# Altium PCB motorPCB.PcbDoc
Units mm, origin at the board's own origin, x right, y up, seen from the top; angles counter-clockwise.
Board outline 85 x 80 mm, 4 copper layers (Top Layer, POWER, GROUND, Bottom Layer), stack 4.342 mm thick; 134 components, 103 nets, 384 pads, 69 vias.
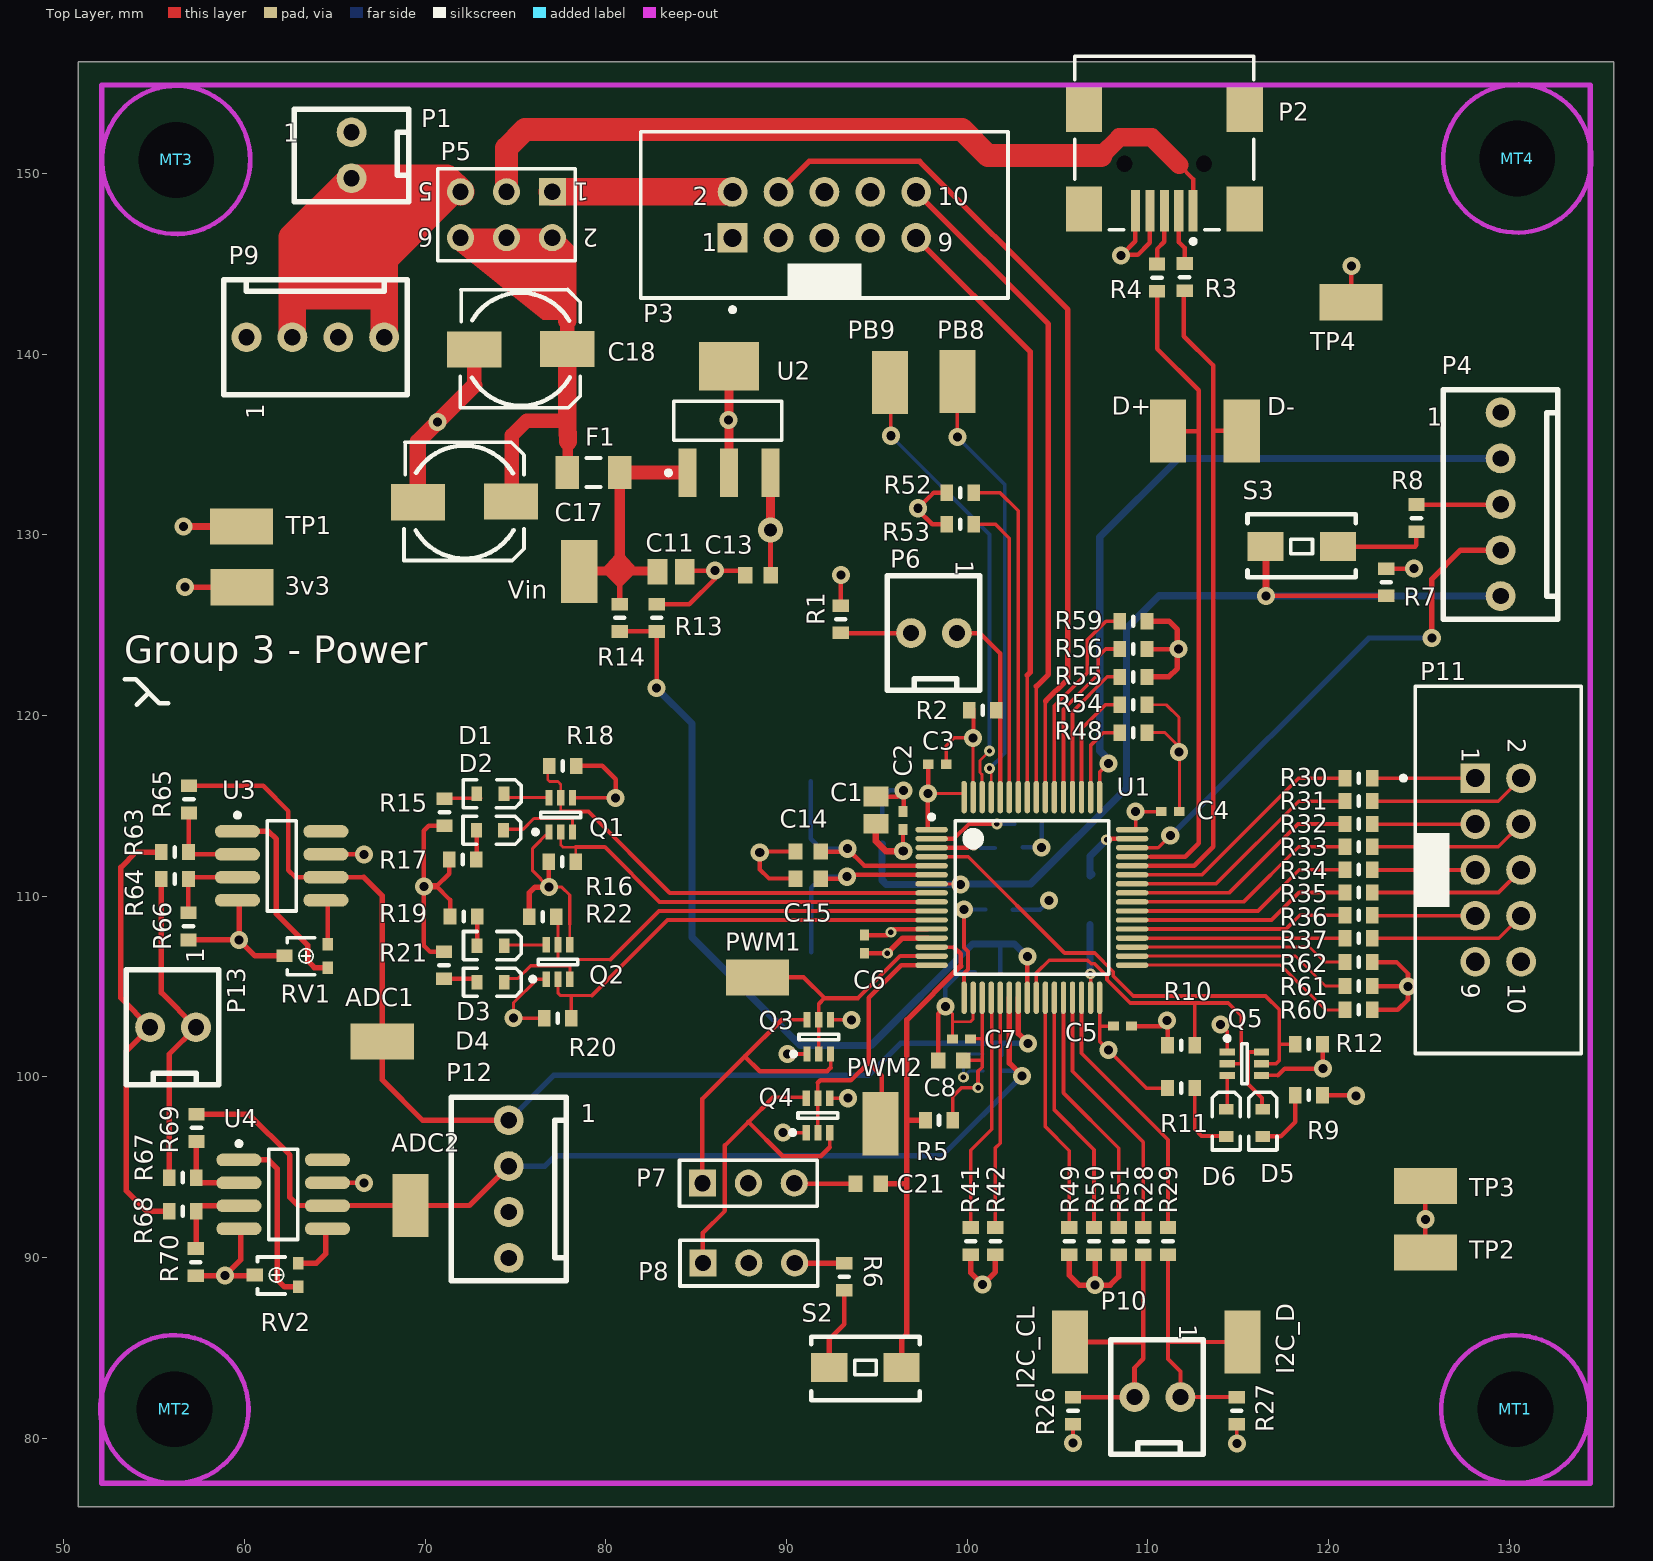
[diagram p0: Top Layer view]
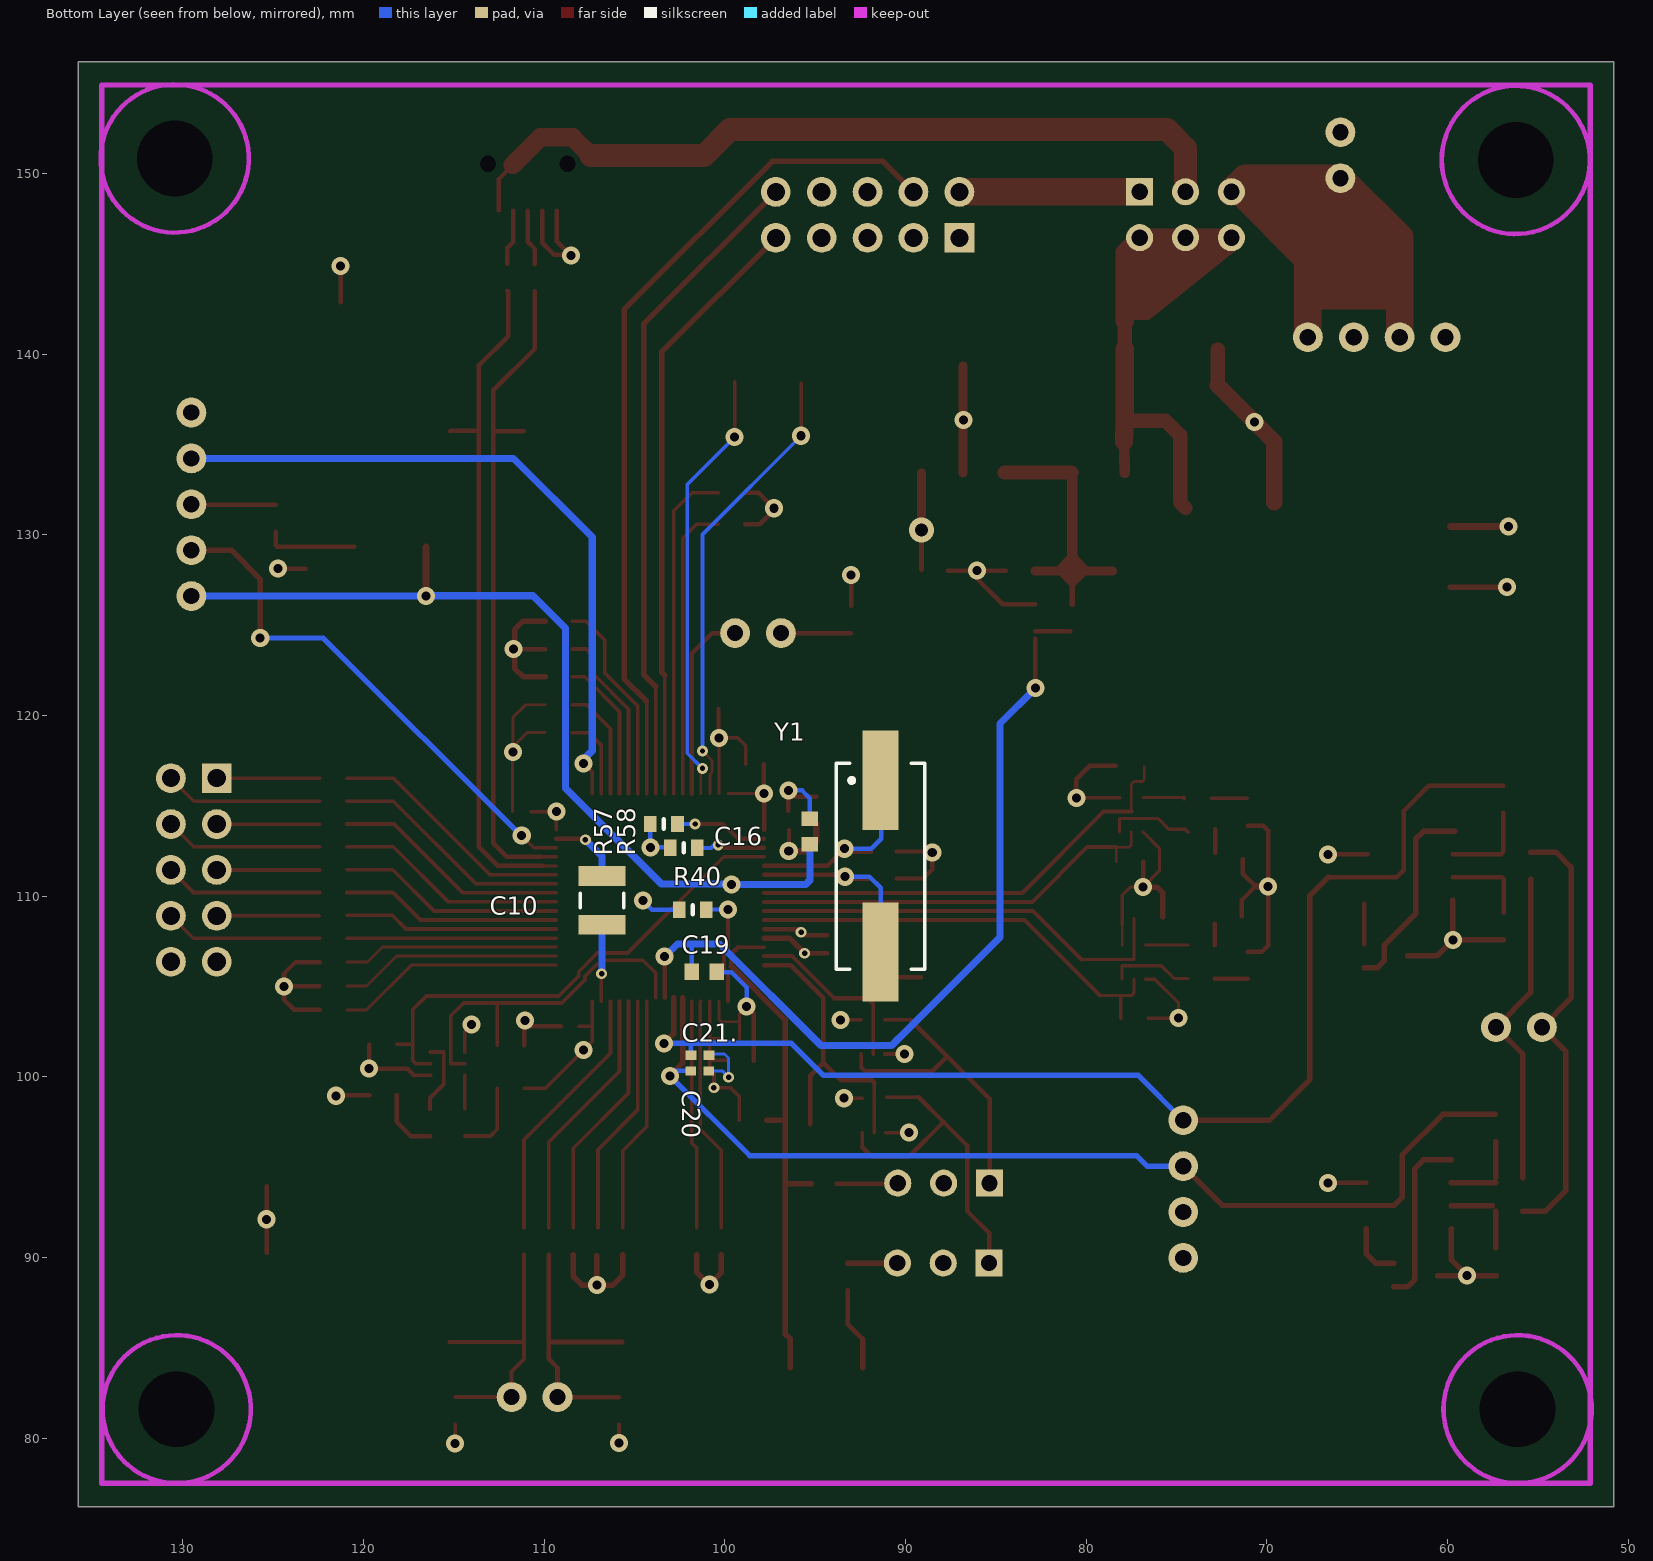
[diagram p1: Bottom Layer view, seen from below]
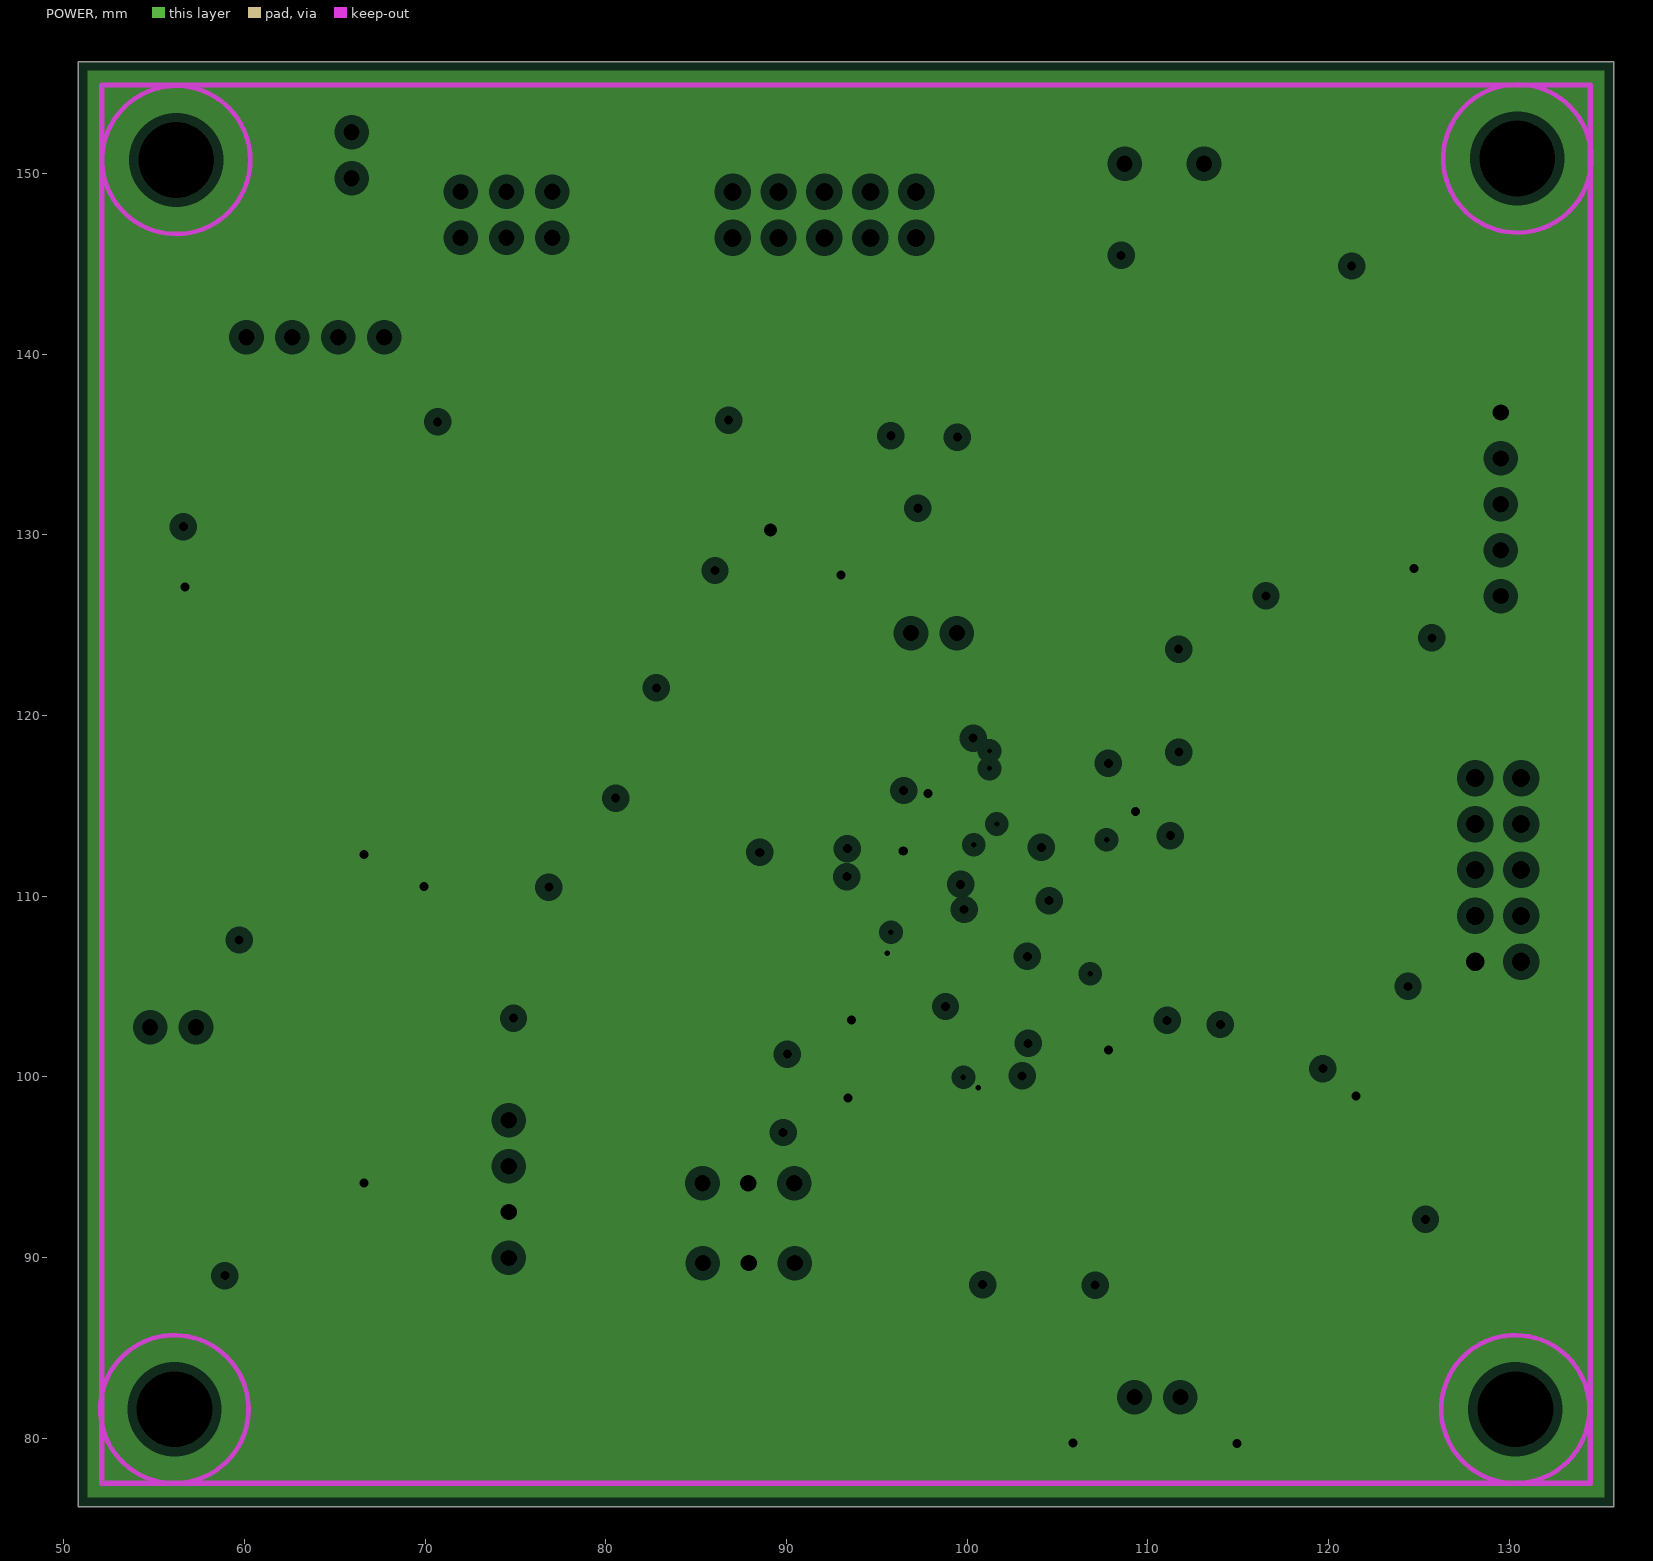
[diagram p2: POWER, clearances drawn from the general rule]
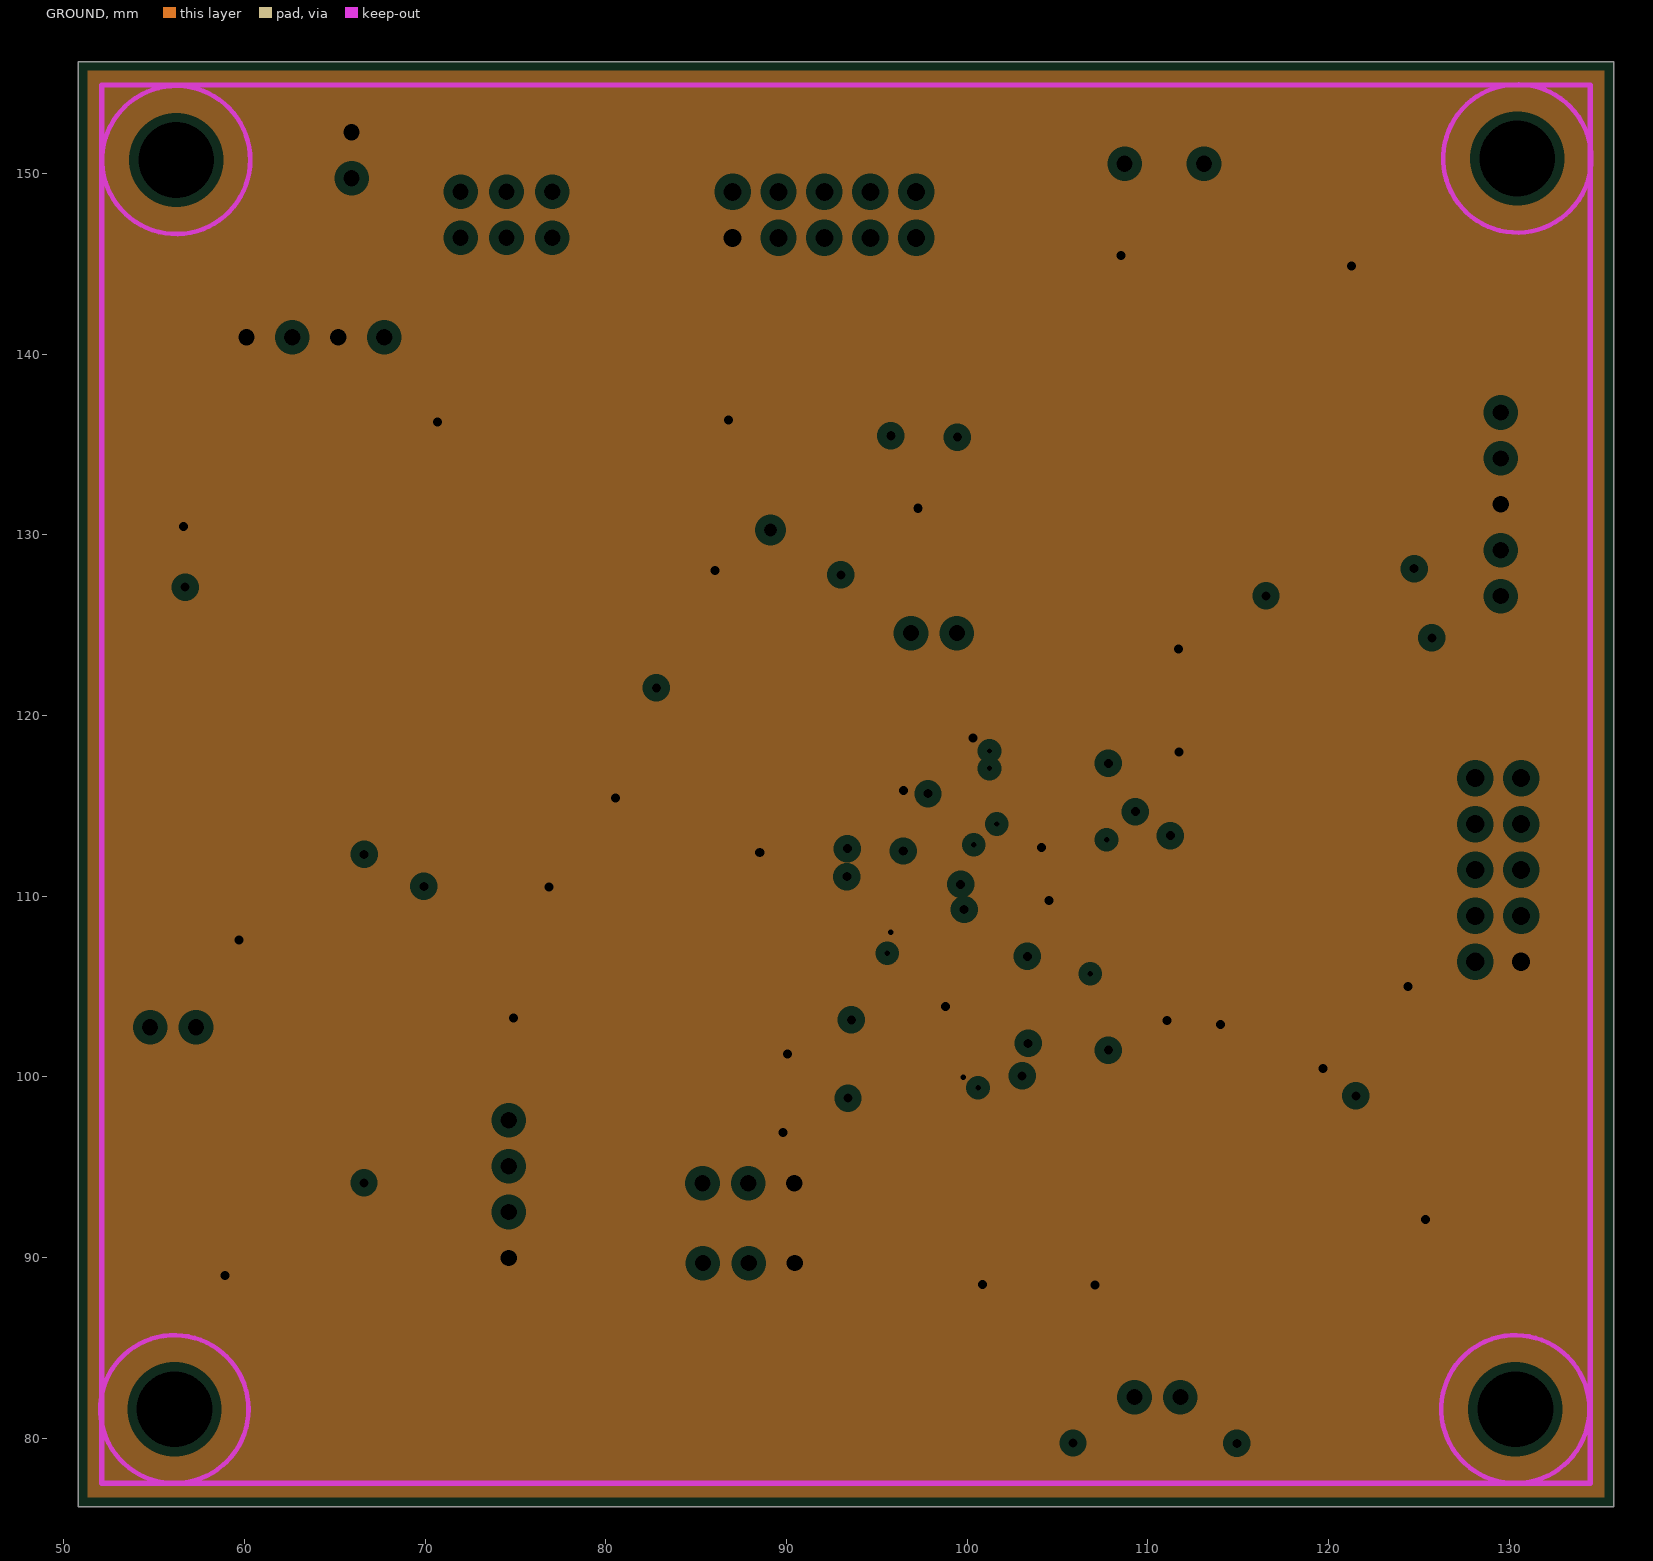
[diagram p3: GROUND, clearances drawn from the general rule]

## Layer stack, top to bottom
Top Layer: signal copper 0.0356
Dielectric: prepreg 1.6, FR-4, Dk 4.8
POWER: plane copper 0.0356, net VDD
Dielectric: core 1, FR-4, Dk 4.8
GROUND: plane copper 0.0356, net GND
Dielectric: prepreg 1.6, FR-4, Dk 4.8
Bottom Layer: signal copper 0.0356

## Board outline
50.8,76.2 135.8,76.2 135.8,156.2 50.8,156.2

## Design rules (kind name [scope] priority, off if disabled: settings)
Clearance [All] p1: gap=0.152
HoleSize [All] p1: absolutevalues=TRUE maxlimit=5 minlimit=0.3 maxpercent=80.000 minpercent=20.000
MinimumAnnularRing [All] p1: minimumring=0.1
MinimumSolderMaskSliver [All] p1: minsoldermaskwidth=0.2
PasteMaskExpansion [All] p1: expansion=0.2
PlaneClearance [All] p1: clearance=0.508
PlaneConnect [All] p1: planeconnectstyle=Relief reliefexpansion=0.508 reliefentries=4 reliefconductorwidth=0.254 reliefairgap=0.254
PolygonConnect [All] p1: connectstyle=Relief reliefconductorwidth=0.254 reliefentries=4 polygonreliefangle="90 Angle" airgapwidth=0.254
RoutingCorners [All] p1: cornerstyle=45-Degree minsetback=0.25 maxsetback=2.54
RoutingVias [All] p1: holewidth=1 width=1 viastyle="Through Hole" minholewidth=0.3 minwidth=0.6 maxholewidth=1.4 maxwidth=1.4
SMDNeckDown [All] p1: percent=50.000
SMDToCorner [All] p1: distance=78740
SMDToPlane [All] p1: distance=1968504
SilkToSolderMaskClearance SilkscreenOverComponentPads [IsPad] p1: minsilkscreentomaskgap=0.254 clearancetoexposedcopper=TRUE
SolderMaskExpansion [All] p1: expansion=0.102
Width [All] p1: maxlimit=2 minlimit=0.152 preferedwidth=0.25
21 further rules are at their usual default settings.

## Classes and differential pairs
component class POWER_power_programing: 1 C1 C2 C3 C4 C5 C6 C7 C8 C10 C11 C13 C14 C15 C16 C17 C18 C19 C21 F1 MT1 MT2 MT3 MT4 P1 P2 P3 P4 P5 P6 P9 P10 P11 R1 R2 R3 R4 R5 R6 R7 R8 R13 R14 R30 R31 R32 R33 R34 R35 R36 R37 R54 R55 R56 R57 R58 R59 S2 S3 U2 Y1
component class POWER_MCU: 3v3 ADC1 ADC2 C20 C21. D1 D2 D3 D4 D5 D6 D+ D- I2C_CL I2C_D P7 P8 P12 P13 PB8 PB9 PWM1 PWM2 Q1 Q2 Q3 Q4 Q5 R9 R10 R11 R12 R15 R16 R17 R18 R19 R20 R21 R22 R26 R27 R28 R29 R40 R41 R42 R48 R49 R50 R51 R52 R53 R60 R61 R62 R63 R64 R65 R66 R67 R68 R69 R70 RV1 RV2 TP1 TP2 TP3 TP4 U1 U3 U4 Vin

## Components (designator, comment, footprint, x,y, rotation, side; value= is the part's Value field where it differs from the comment)
3v3 "TP" TEST_POINT_3.5X2MM#1 59.868,127.102 r0 top
ADC1 "TP" TEST_POINT_3.5X2MM#1 67.636,101.961 r180 top
ADC2 "TP" TEST_POINT_3.5X2MM#1 69.187,92.874 r90 top
C1 "4.7uF" CAPC2012L 94.956,114.759 r270 top
C2 "100nF" CAPC1005L 96.456,114.184 r270 top
C3 "100nF" CAPC1005L 98.35,117.3 r180 top
C4 "100nF" CAPC1005L 111.25,114.675 r180 top
C5 "100nF" CAPC1005L 108.6,102.8 r180 top
C6 "100nF" CAPC1005L 94.336,107.34 r270 top
C7 "100nF" CAPC1005L 99.7,102.1 r0 top
C8 "1uF" CAPC1608L 99.1,100.9 r0 top
C10 "2.2uF" 14-1210 106.806,109.767 r90 bottom
C11 "2.2uF" CAPC2012L 83.625,127.95 r0 top
C13 "1uF" CAPC1608L 88.424,127.759 r0 top
C14 "10nF" CAPC1608L 91.206,112.468 r0 top
C15 "10nF" CAPC1608L 91.206,110.968 r0 top
C16 "10nF" CAPC1608L 95.309,113.581 r270 bottom
C17 "100uF/16V" NICH-1 72.175,131.825 r0 top
C18 "100uF/16V" NICH-1 75.287,140.281 r0 top
C19 "100nF" CAPC1608L 101.143,105.816 r180 bottom
C20 "100nF" CAPC1005L 101.397,100.33 r0 bottom
C21 "10nF" CAPC1608L 94.525,94.075 r0 top
C21. "100nF" CAPC1005L 101.38,101.194 r180 bottom
D1 "#NAME?" LED0.8X1.6 73.613,115.671 r0 top
D2 "#NAME?" LED0.8X1.6 73.6,113.649 r0 top
D3 "#NAME?" LED0.8X1.6 73.631,107.264 r0 top
D4 "#NAME?" LED0.8X1.6 73.631,105.236 r0 top
D5 "#NAME?" LED0.8X1.6 116.376,97.45 r90 top
D6 "#NAME?" LED0.8X1.6 114.349,97.45 r90 top
D+ "TP" TEST_POINT_3.5X2MM#1 111.134,135.744 r90 top
D- "TP" TEST_POINT_3.5X2MM#1 115.206,135.744 r90 top
F1 "1A" RESC3216N 79.325,133.45 r0 top
I2C_CL "TP" TEST_POINT_3.5X2MM#1 105.689,85.319 r90 top
I2C_D "TP" TEST_POINT_3.5X2MM#2 115.24,85.268 r90 top
MT1 "M4.2 NPTH" MNT-HOLE_4.2mm_NPTH#1 130.35,81.6 r0 top
MT2 "M4.2 NPTH" MNT-HOLE_4.2mm_NPTH#2 56.125,81.6 r0 top
MT3 "M4.2 NPTH" MNT-HOLE_4.2mm_NPTH#1 56.225,150.75 r0 top
MT4 "M4.2 NPTH" MNT-HOLE_4.2mm_NPTH#1 130.457,150.829 r0 top
P1 "Value" MOLEX_KK_2_HDR 65.931,152.283 r270 top
P2 "JS_USB_MINI_B" USB/SM0.8-6H5 110.919,155.793 r90 top
P3 "Header 5X2 Vert" IDC2.54-V10D 92.106,147.711 r0 top
P4 "5 Pin Molex KK Hdr" MOLEX_KK_5_HDR 129.536,136.77 r270 top
P5 "Header 3X2" HDR2X3 77.044,148.988 r180 top
P6 "2 Pin Molex KK HDR" MOLEX_KK_2_HDR 99.441,124.562 r180 top
P7 "Header 3" HDR1X3 85.354,94.114 r0 top
P8 "Header 3" HDR1X3 85.379,89.689 r0 top
P9 "4 Pin Molex KK Hdr" MOLEX_KK_4_HDR 60.115,140.939 r0 top
P10 "2 Pin Molex KK HDR" MOLEX_KK_2_HDR 111.811,82.271 r180 top
P11 "Header 5X2 Vert" IDC2.54-V10D 129.4,111.45 r270 top
P12 "4 Pin Molex KK Hdr" MOLEX_KK_4_HDR 74.636,97.594 r270 top
P13 "2 Pin" MOLEX_KK_2_HDR 57.32,102.741 r180 top
PB8 "TP" TEST_POINT_3.5X2MM#1 99.466,138.481 r90 top
PB9 "TP" TEST_POINT_3.5X2MM#1 95.733,138.43 r90 top
PWM1 "TP" TEST_POINT_3.5X2MM#1 88.404,105.504 r0 top
PWM2 "TP" TEST_POINT_3.5X2MM#1 95.215,97.395 r90 top
Q1 "DUAL-NFET" SOT363-6N 77.511,114.503 r90 top
Q2 "DUAL-NFET" SOT363-6N 77.361,106.353 r90 top
Q3 "PFET-NFET" SOT363-6N 91.795,102.21 r90 top
Q4 "PFET-NFET" SOT363-6N 91.745,97.861 r90 top
Q5 "DUAL-NFET" SOT363-6N 115.35,100.725 r0 top
R1 "220R" RESC1608L 93.015,125.324 r90 top
R2 "22K" RESC1608L 100.863,120.294 r0 top
R3 "22R" RESC1608L 112.044,144.267 r90 top
R4 "22R" RESC1608L 110.519,144.24 r90 top
R5 "10K" RESC1608L 98.45,97.6 r0 top
R6 "470R" RESC1608L 93.203,88.937 r90 top
R7 "10K" RESC1608L 123.2,127.375 r90 top
R8 "470R" RESC1608L 124.875,130.925 r90 top
R9 "110R" RESC1608L 118.925,98.975 r0 top
R10 "1M" RESC1608L 111.85,101.75 r0 top
R11 "110R" RESC1608L 111.85,99.375 r180 top
R12 "1M" RESC1608L 118.925,101.8 r180 top
R13 "3M3" RESC1608L 82.825,125.4 r270 top
R14 "10M" RESC1608L 80.775,125.4 r90 top
R15 "220R" RESC1608L 71.075,114.65 r270 top
R16 "1M" RESC1608L 77.6,111.9 r0 top
R17 "220R" RESC1608L 72.083,112.029 r180 top
R18 "1M" RESC1608L 77.615,117.209 r180 top
R19 "110R" RESC1608L 72.132,108.875 r180 top
R20 "1M" RESC1608L 77.339,103.245 r0 top
R21 "110R" RESC1608L 71.05,106.175 r90 top
R22 "1M" RESC1608L 76.511,108.857 r0 top
R26 "4K7" RESC1608L 105.867,81.509 r270 top
R27 "4K7" RESC1608L 114.935,81.509 r90 top
R28 "100R" RESC1608L 109.76,90.907 r270 top
R29 "100R" RESC1608L 111.125,90.907 r270 top
R30 "100R" RESC1608L 121.675,116.525 r0 top
R31 "100R" RESC1608L 121.675,115.261 r0 top
R32 "100R" RESC1608L 121.675,113.996 r0 top
R33 "100R" RESC1608L 121.675,112.732 r0 top
R34 "100R" RESC1608L 121.675,111.468 r0 top
R35 "100R" RESC1608L 121.675,110.204 r180 top
R36 "100R" RESC1608L 121.675,108.939 r180 top
R37 "100R" RESC1608L 121.675,107.675 r180 top
R40 "1K" RESC1608L 101.778,109.245 r0 bottom
R41 "1K" RESC1608L 100.203,90.907 r270 top
R42 "1K" RESC1608L 101.568,90.907 r270 top
R48 "1K" RESC1608L 109.208,119.05 r0 top
R49 "1K" RESC1608L 105.664,90.907 r270 top
R50 "1K" RESC1608L 107.029,90.907 r270 top
R51 "1K" RESC1608L 108.394,90.907 r270 top
R52 "1K" RESC1608L 99.631,132.334 r180 top
R53 "1K" RESC1608L 99.631,130.581 r180 top
R54 "1K" RESC1608L 109.208,120.593 r0 top
R55 "1K" RESC1608L 109.208,122.136 r0 top
R56 "1K" RESC1608L 109.208,123.679 r0 top
R57 "1K" RESC1608L 103.378,113.995 r0 bottom
R58 "1K" RESC1608L 102.286,112.674 r0 bottom
R59 "1K" RESC1608L 109.208,125.222 r0 top
R60 "1K" RESC1608L 121.675,103.708 r0 top
R61 "1K" RESC1608L 121.675,105.03 r0 top
R62 "1K" RESC1608L 121.675,106.352 r0 top
R63 "10K" RESC1608L 56.153,112.441 r0 top
R64 "10K" RESC1608L 56.151,110.947 r0 top
R65 "51K" RESC1608L 56.93,115.356 r270 top
R66 "51K" RESC1608L 56.903,108.325 r270 top
R67 "10K" RESC1608L 56.59,94.419 r0 top
R68 "10K" RESC1608L 56.583,92.564 r0 top
R69 "51K" RESC1608L 57.352,97.171 r270 top
R70 "51K" RESC1608L 57.302,89.742 r270 top
RV1 "10K" PVZ2A 63.415,106.694 r90 top
RV2 "10K" PVZ2A 61.776,89.027 r90 top
S2 "EVQPNF05M" EVQPNF05M 94.375,83.9 r180 top
S3 "EVQPNF05M" EVQPNF05M 118.525,129.35 r0 top
TP1 "GND" TEST_POINT_3.5X2MM#1 59.842,130.454 r0 top
TP2 "GND" TEST_POINT_3.5X2MM#1 125.374,93.955 r0 top
TP3 "GND" TEST_POINT_3.5X2MM#1 125.374,90.272 r0 top
TP4 "GND" TEST_POINT_3.5X2MM#1 121.26,142.875 r180 top
U1 "STM32F405RGT6" TQFP64_N 103.588,109.929 r0 top
U2 "LT1963" SOT223-4M 86.821,136.382 r90 top
U3 "uA741C" D008_M 62.061,111.679 r0 top
U4 "uA741C" D008_M 62.145,93.495 r0 top
Vin "TP" TEST_POINT_3.5X2MM#1 78.537,127.965 r90 top
Y1 "8MHz" HC49/4h_SMX 91.383,111.656 r270 bottom

## Footprints (in the part's own frame and the unit in brackets; to place one, negate y for a bottom-side part, rotate by r counter-clockwise, add the part's x,y. Pads: shape width x height; smd on the part's side, far side on the other; paste and mask are expansions set on the pad)
14-1210 [mm] "Chip Resistor, Body 3.2x2.5mm, IPC High Density"
  rect 1.1x2.6 smd: 1(-1.35,0) 2(1.35,0)
  silkscreen extent -0.4,-1.2 0.4,1.2, body extent -1.68,-1.32 1.68,1.32, height 0.9
CAPC1005L [mm] "Chip Capacitor, Body 1.0x0.5mm, IPC High Density"
  rect 0.6x0.5 smd: 1(-0.5,0) 2(0.5,0)
  body extent -0.55,-0.3 0.55,0.3, height 0.6
CAPC1608L [mm] "Chip Capacitor, Body 1.6x0.8mm, IPC High Density"
  rect 0.8x0.9 smd: 1(-0.7,0) 2(0.7,0)
  body extent -0.87,-0.48 0.87,0.48, height 0.85
CAPC2012L [mm] "Chip Capacitor, Body 2.0x1.3mm, IPC High Density"
  rect 1.1x1.4 smd: 1(-0.75,0) 2(0.75,0)
  body extent -1.1,-0.72 1.1,0.72, height 1.1
D008_M [mm] "SOIC, 8-Leads, Body 4.9x3.9mm, Pitch 1.27mm, IPC Low Density"
  oval 2.5x0.7 smd: 1(-2.45,1.905) 2(-2.45,0.635) 3(-2.45,-0.635) 4(-2.45,-1.905) 5(2.45,-1.905) 6(2.45,-0.635) 7(2.45,0.635) 8(2.45,1.905)
  silkscreen extent -2.57,-2.5 0.8,2.93, body extent -2,-2.5 2,2.5, height 1.75
EVQPNF05M [mm] "Panansonic light touch SMD push button switch"
  rect 2x1.6 smd: 1(-2,0) 2(2,0)
  silkscreen extent -3,-1.7 3,1.8, body extent -3,-1.7 3,1.8, height 5
HC49/4h_SMX [mm] "Quartz Crystal, SM; Body 13.4 (inc. leads) x 4.9 mm (LxW max)"
  rect 5.5x2 smd: 1(-4.75,0) 2(4.75,0)
  silkscreen extent -5.7,-2.45 5.7,2.45, body extent -5.61,-2.35 5.56,2.35, height 4
HDR1X3 [mm] "Connector; Header; 3 Position"
  rect 1.5x1.5 hole 0.9: 1(0,0)
  round 1.5 hole 0.9: 2(2.54,0) 3(5.08,0)
  silkscreen extent -1.27,-1.27 6.35,1.27
HDR2X3 [mm] "Connector; Header; 3x2 Position"
  rect 1.5x1.5 hole 0.9: 1(0,0)
  round 1.5 hole 0.9: 2(0,2.54) 3(2.54,0) 4(2.54,2.54) 5(5.08,0) 6(5.08,2.54)
  silkscreen extent -1.27,-1.27 6.35,3.81
IDC2.54-V10D [mm] "Connector; IDC, Low Profile Male Header, Thru-Hole; 10 Position; Vertical; Pitch 2.54 mm; Body 20.32 x 9.2 x 9.45 mm (LxWxH)"
  rect 1.65x1.65 hole 1: 1(-5.08,-1.27)
  round 1.65 hole 1: 2(-5.08,1.27) 3(-2.54,-1.27) 4(-2.54,1.27) 5(0,-1.27) 6(0,1.27) 7(2.54,-1.27) 8(2.54,1.27) 9(5.08,-1.27) 10(5.08,1.27)
  silkscreen extent -10.16,-5.37 10.16,4.6, body extent -10.16,-4.6 10.16,4.6, height 9.45
LED0.8X1.6 [mm] "LED 0603"
  rect 0.6x0.8 smd: 1(-0.75,0) 2(0.75,0)
  silkscreen extent -1.5,-0.78 1.7,0.78
MNT-HOLE_4.2mm_NPTH#1 [mm] "Mounting Hole 4.2mm non plated"
  round 0 hole 4.2 unplated: 1(0,0)
  Keep-Out Layer circle w0.254: c0,0 r4.1
MNT-HOLE_4.2mm_NPTH#2 [mm] "Mounting Hole 4.2mm non plated"
  round 0 hole 4.2 unplated: 1(0.005,0)
  Keep-Out Layer circle w0.254: c0,0 r4.1
MOLEX_KK_2_HDR [mil] "MOLEX_KK_2_HDR"
  round 65 hole 35.43: 1(0,0) 2(100,0)
  silkscreen extent -50,-125 152,125, body extent -44,-121 146,119, height 630
MOLEX_KK_4_HDR [mil] "MOLEX_KK_4_HDR"
  round 65 hole 35.43: 1(0,0) 2(100,0) 3(200,0) 4(300,0)
  silkscreen extent -50,-125 350,125, body extent -44,-119 343,119, height 630
MOLEX_KK_5_HDR [mil] "MOLEX_KK_5_HDR"
  round 65 hole 35.43: 1(0,0) 2(100,0) 3(200,0) 4(300,0) 5(400,0)
  silkscreen extent -50,-125 450,125, body extent -44,-118 444,118, height 630
NICH-1 [mm] "Electrolytic capacitor"
  rect 3x2 smd: 1(-2.561,-0.022) 2(2.584,0.011)
  silkscreen extent -3.34,-3.25 3.3,3.3, body extent -3.2,-3.21 3.2,3.2, height 5.3
PVZ2A [mm] "MuRata Trimmer Pots"
  rect 0.7x0.6 smd: 1(-0.65,-1.2) 3(0.65,-1.2)
  rect 0.7x0.9 smd: 2(0,1.2)
  silkscreen extent -1.05,-0.47 1,1.05, body extent -0.95,-0.82 0.92,0.96, height 1.6
RESC1608L [mm] "Chip Resistor, Body 1.6x0.8mm, IPC High Density"
  rect 0.7x0.9 smd: 1(-0.75,0) 2(0.75,0)
  silkscreen extent 0,-0.25 0,0.25, body extent -0.85,-0.48 0.85,0.48, height 0.9
RESC3216N [mm] "Chip Resistor, Body 3.2x1.6mm, IPC Medium Density"
  rect 1.3x1.8 smd: 1(-1.45,0) 2(1.45,0)
  silkscreen extent -0.4,-0.8 0.4,0.8, body extent -1.68,-0.87 1.68,0.87, height 0.71
SOT223-4M [mm] "SOT223, 4-Leads, Body 6.5x3.5mm, Pitch 2.3mm, Lead Span 7mm, IPC Low Density"
  rect 2.7x1 smd: 1(-2.95,2.3) 2(-2.95,0) 3(-2.95,-2.3)
  rect 2.7x3.3 smd: 4(2.95,0)
  silkscreen extent -3.07,-2.92 1.02,3.47, body extent -1.85,-3.35 1.85,3.35, height 1.8
SOT363-6N [mm] "SOT363, 6-Leads, Body 2x1.3mm, Pitch 0.65mm, Lead Span 2.1mm, IPC Medium Density"
  rect 0.85x0.4 smd mask+0.02: 1(-0.95,0.65) 2(-0.95,0) 3(-0.95,-0.65) 4(0.95,-0.65) 5(0.95,0) 6(0.95,0.65)
  silkscreen extent -1.07,-1.1 0.15,1.52, body extent -0.7,-1.1 0.7,1.1, height 1
TEST_POINT_3.5X2MM#1 [mm] "Test Point Pad"
  rect 3.5x2 smd: 1(0,0)
  body extent -1.75,-1.01 1.75,1, height 2
TEST_POINT_3.5X2MM#2 [mm] "Test Point Pad"
  rect 3.5x2 smd: 1(0.051,0)
  body extent -1.75,-1.01 1.75,1, height 2
TQFP64_N [mm] "Thin QFP, 64-Leads, Body 10x10mm, Pitch 0.5mm, IPC Medium Density"
  oval 1.8x0.3 smd paste+0.08 mask+0: 1(-5.55,3.75) 2(-5.55,3.25) 3(-5.55,2.75) 4(-5.55,2.25) 5(-5.55,1.75) 6(-5.55,1.25) 7(-5.55,0.75) 8(-5.55,0.25) 9(-5.55,-0.25) 10(-5.55,-0.75) 11(-5.55,-1.25) 12(-5.55,-1.75) 13(-5.55,-2.25) 14(-5.55,-2.75) 15(-5.55,-3.25) 16(-5.55,-3.75) 33(5.55,-3.75) 34(5.55,-3.25) 35(5.55,-2.75) 36(5.55,-2.25) 37(5.55,-1.75) 38(5.55,-1.25) 39(5.55,-0.75) 40(5.55,-0.25) 41(5.55,0.25) 42(5.55,0.75) 43(5.55,1.25) 44(5.55,1.75) 45(5.55,2.25) 46(5.55,2.75) 47(5.55,3.25) 48(5.55,3.75)
  oval 0.3x1.8 smd paste+0.08 mask+0: 17(-3.75,-5.55) 18(-3.25,-5.55) 19(-2.75,-5.55) 20(-2.25,-5.55) 21(-1.75,-5.55) 22(-1.25,-5.55) 23(-0.75,-5.55) 24(-0.25,-5.55) 25(0.25,-5.55) 26(0.75,-5.55) 27(1.25,-5.55) 28(1.75,-5.55) 29(2.25,-5.55) 30(2.75,-5.55) 31(3.25,-5.55) 32(3.75,-5.55) 49(3.75,5.55) 50(3.25,5.55) 51(2.75,5.55) 52(2.25,5.55) 53(1.75,5.55) 54(1.25,5.55) 55(0.75,5.55) 56(0.25,5.55) 57(-0.25,5.55) 58(-0.75,5.55) 59(-1.25,5.55) 60(-1.75,5.55) 61(-2.25,5.55) 62(-2.75,5.55) 63(-3.25,5.55) 64(-3.75,5.55)
  silkscreen extent -5.67,-4.25 4.25,4.57, body extent -5,-5 5,5, height 1.6
USB/SM0.8-6H5 [mm] "Connector; USB2.0, Type B, SM; 5 Position; Right Angle"
  rect 2.3x0.5 smd: 1(-7.85,-1.6) 2(-7.85,-0.8) 3(-7.85,0) 4(-7.85,0.8) 5(-7.85,1.6)
  rect 2.5x2 smd: 6(-7.75,4.45) 7(-2.25,4.45) 8(-7.75,-4.45) 9(-2.25,-4.45)
  round 0.6 hole 0.9 unplated: MH1(-5.25,2.2) MH2(-5.25,-2.2)
  silkscreen extent -9.67,-4.95 0.7,4.95, body extent -8.9,-4.95 0.7,4.95, height 3.9

## Part data
3v3 ADC1 ADC2 D+ D- I2C_CL I2C_D PB8 PB9 PWM1 PWM2 TP1 TP2 TP3 TP4 Vin: library part TP_TESTPOINT, "Test-Point SMD"
C1: library part CC_4.7uF_0805, "CAP CER 4.7uF Y5V -20% +80% 16V 0805"
C2 C3 C4 C5 C6 C7 C20 C21.: library part CC_100nF_0402, "CAP CER 100nF X7R +-10% 16V 0402"
C8 C13: library part CC_1uF_0603, "CAP CER 1uF Y5V -20% +80% 16V 0603"
C10 C11: library part CC_2.2uF_0805, "CAP CER 2.2uF Y5V -20% +80% 25V 0805"
C14 C15 C16 C21: library part CC_10nF_0603, "CAP CER 10nF X7R +-10% 50V 0603"
C17 C18: library part CA_100uF_16V_SMD, "Nichcon WX series  SMT Aluminium Electrolytic Cap"
C19: library part CC_100nF_0603, "CAP CER 100nF X7R +-10% 50V 0603"
D1 D2: library part DL_TLMB1100, "LED Blue 0603"
D3 D4: library part DL_TLMS1100, "LED Red 0603"
D5: library part DL_TLMG1100, "LED Green 0603"
D6: library part DL_TLMY1100, "LED Yellow 0603"
F1: library part FS_Fuse_1.0A_SMD_1206, "Fuse 1.0A Very Fast Acting 1206"
MT1 MT2 MT3 MT4: library part MC_M4.2_HOLE_NPT, "Fixing M4.2 Mount Hole NPTH"
P1 P6 P10 P13: library part JA_MOLEX_KK_2POS, "CONN HEADER 2POS 2.54mm VERT_Thru Hole"
P2: library part JS_USB_MINI_B_SMT, "USB 2.0, Right Angle, SMT, B Type, Receptacle, 5 Position,"
P3 P11: library part JA_HDR_IDC_5X2_VERT, "IDC Header, 2,54mm, 10-Pin, Vert"
P4: library part JA_MOLEX_KK_5POS, "CONN HEADER 5POS 2.54mm VERT_Thru Hole"
P5: "Header, 3-Pin, Dual row"
P7 P8: "Header, 3-Pin"
P9 P12: library part JA_MOLEX_KK_4POS, "CONN HEADER 4POS 2.54mm VERT_Thru Hole"
Q3 Q4: library part DUAL-NFET
R1 R15 R17: library part RS_220R, "RES 220 OHM 1/10W 5% 0603 SMD"
R2: library part RS_22K, "RES 22.0K OHM 1/10W 5% 0603 SMD"
R3 R4: library part RS_22R, "RES 22 OHM 1/10W 5% 0603 SMD"
R5 R7 R63 R64 R67 R68: library part RS_10K, "RES 10.0K OHM 1/10W 5% 0603 SMD"
R6 R8: library part RS_470R, "RES 470 OHM 1/10W 5% 0603 SMD"
R9 R11 R19 R21: library part RS_110R, "RES 110 OHM 1/10W 5% 0603 SMD"
R10 R12 R16 R18 R20 R22: library part RS_1M, "RES 1.0M OHM 1/10W 5% 0603 SMD"
R13: library part RS_3M3, "RES 3.3M OHM 1/10W 5% 0603 SMD"
R14: library part RS_10.0M, "RES 10.0M OHM 1/10W 5% 0603 SMD"
R26 R27: library part RS_4K7, "RES 4.7K OHM 1/10W 5% 0603 SMD"
R28 R29 R30 R31 R32 R33 R34 R35 R36 R37: library part RS_100R, "RES 100 OHM 1/10W 5% 0603 SMD"
R40 R41 R42 R48 R49 R50 R51 R52 R53 R54 R55 R56 R57 R58 R59 R60 R61 R62: library part RS_1K, "RES 1.0K OHM 1/10W 5% 0603 SMD"
R65 R66 R69 R70: library part RS_51K, "RES 51.0K OHM 1/10W 5% 0603 SMD"
RV1 RV2: library part RM_10K, "Trim Pot SMD 10K Murata PVZ2 Series"
S2 S3: library part WS_EVQPNF05M, "Panasonic 6 x 3.5mm SMD Light Touch Switch Type"
U1: "ARM Cortex-M4 32b MCU+FPU, 210DMIP, 1024 kB Flash, 192+4 kB RAM, 51 I/Os, 64-pin LQFP, -40 to +85°C, Tray"
U3 U4: library part LM101AJG, "High Performance Operational Amplifier"
Y1: library part XT_8MHz_HC49/4H, "CRYSTAL 8.00 MHZ 18PF SMD"

## Via types
v1: diameter 1, hole 0.5, Top Layer to Bottom Layer, 29 vias
v2: diameter 1, hole 0.5, Top Layer to Bottom Layer, tented top, 17 vias
v3: diameter 1, hole 0.5, Top Layer to Bottom Layer, tented both sides, 12 vias
v4: diameter 0.6, hole 0.3, Top Layer to Bottom Layer, tented both sides, 6 vias
v5: diameter 0.6, hole 0.3, Top Layer to Bottom Layer, 3 vias
v6: diameter 1.4, hole 0.7, Top Layer to Bottom Layer, tented top, 1 vias
v7: diameter 0.6, hole 0.3, Top Layer to Bottom Layer, tented top, 1 vias

## Nets (pads, with @x,y where several pads share a name; then routed paths per layer and width w, separated by ;. In a path a pad name is that pad's centre, name@x,y a point inside that pad or via, vN(x,y) a via of type N, cw(c..) or ccw(c..) an arc to the next point about the centre after c; other vN are vias at no path point)
ADC: C19.1 R13.2 R14.1 U1.24 | length 46.8
  Top Layer w0.25: R14.1@80.875,124.65 R13.2 ; v2@82.825,121.525 82.825,124.25 ; U1.24 v3(103.338,106.67)
  Bottom Layer w0.25: C19.1@101.831,105.789 101.831,107.348
  Bottom Layer w0.4: v2(82.8,121.525) 84.775,119.55 84.775,107.725 90.398,102.102 90.403,102.102 90.78,101.725 94.675,101.725 100.3,107.35 101.829,107.35 ; 101.831,107.35 102.632,107.35 v3@103.3,106.682
ADC_1: ADC1.1 C21..1 P12.1 R65.1 U1.23 U3.6 | length 67.2
  Top Layer w0.25: R65.1 61.034,116.106 62.43,114.709 62.43,111.439 62.825,111.044 66.607,111.044
  Top Layer w0.3: 66.607,111.044 67.636,110.016 ADC1.1 67.636,99.828 69.869,97.594 P12.1 ; U1.23 102.838,102.394 v1(103.378,101.854)
  Bottom Layer w0.25: C21..1@101.906,101.194 101.906,101.853
  Bottom Layer w0.3: P12.1 77.118,100.076 94.539,100.076 96.317,101.854 v1(103.378,101.854)
ADC_2: ADC2.1 C20.2 P12.2 R69.1 U1.22 U4.6 | length 58
  Top Layer w0.3: R69.1 60.259,97.921 62.519,95.661 62.519,93.317 62.962,92.874 ADC2.1 72.456,92.874 P12.2 ; U1.22 102.338,100.761 v1(103.048,100.051)
  Bottom Layer w0.25: C20.2 102.768,100.33 v1(103.048,100.051)
  Bottom Layer w0.3: P12.2 76.635,95.054 77.211,95.631 98.628,95.631 v1(103.048,100.051)
BOOT0: P6.1 R2.2 U1.60 | length 10.6
  Top Layer w0.25: P6.1 100.711,124.562 101.838,123.435 U1.60@101.838,115.679
CLK: P3.4 U1.55 | length 47.4
  Top Layer w0.2: U1.55@104.338,115.679 104.338,120.788
  Top Layer w0.3: P3.4 91.26,150.675 97.375,150.675 105.577,142.473 105.577,122.027 104.348,120.798
CS: P3.5
D1D: D1.2 Q1.6 | length 2.3
  Top Layer w0.178: D1.2@74.623,115.453 Q1.6
  Top Layer w0.229: D1.2@74.588,115.419 D1.2@74.623,115.453
D1G: Q1.2 R16.2 U1.9 | length 23.2
  Top Layer w0.152: Q1.2 77.511,112.839 77.639,112.711 78.339,112.711 R16.2@78.339,111.9
  Top Layer w0.229: 78.339,112.711 79.948,112.711 82.98,109.679 U1.9@97.838,109.679
D2D: D2.2 Q1.3 | length 4.9
  Top Layer w0.152: Q1.3 78.161,114.3
  Top Layer w0.178: D2.2@74.35,113.539 74.511,113.7 75.425,113.7 76.025,114.3 78.161,114.3
D2G: Q1.5 R18.2 U1.8 | length 25.2
  Top Layer w0.152: R18.2@76.786,117.16 76.786,116.464 76.9,116.35 77.35,116.35 77.511,116.189 Q1.5 77.511,114.675
  Top Layer w0.229: 77.511,114.675 79.05,114.675 83.546,110.179 U1.8@97.838,110.179
D3D: D3.2 Q2.6 | length 2.3
  Top Layer w0.178: D3.2@74.381,107.303 Q2.6
D3G: Q2.2 R20.2 U1.11 | length 24.3
  Top Layer w0.178: Q2.2 77.361,104.614 77.475,104.5 79.25,104.5 ; R20.2 78.089,104.5
  Top Layer w0.229: 79.25,104.5 83.429,108.679 U1.11@97.838,108.679
D4D: D4.2 Q2.3 | length 4.7
  Top Layer w0.178: D4.2@74.381,105.439 75.139,105.439 75.85,106.15 78.025,106.15 Q2.3@78.025,105.418
D4G: Q2.5 R22.2 U1.10 | length 23.8
  Top Layer w0.178: R22.2@77.361,108.757 Q2.5 77.361,106.5 80.262,106.5
  Top Layer w0.229: 80.262,106.5 82.941,109.179 U1.10@97.838,109.179
GND: C1.1 C2.1 C3.1 C4.1 C5.1 C6.1 C7.1 C8.1 C11.2 C13.1 C14.1 C15.1 C16.1 C17.1 C18.1 C19.2 C20.1 C21.1 C21..2 P1.1 P2.4 P2.5 P3.1 P4.3 P7.3 P8.3 P9.1 P9.3 P11.10 P12.4 Q1.1 Q1.4 Q2.1 Q2.4 Q3.1 Q4.1 Q5.1 Q5.4 R2.1 R6.2 R8.2 R10.1 R12.1 R13.1 R16.1 R18.1 R20.1 R22.1 R40.2 R41.2 R42.2 R48.2 R49.2 R50.2 R51.2 R52.2 R53.2 R54.2 R55.2 R56.2 R57.2 R58.2 R59.2 R60.2 R61.2 R62.2 R66.2 R70.2 RV1.2 RV2.2 TP1.1 TP2.1 TP3.1 TP4.1 U1.12 U1.18 U1.63 U2.2 U2.4 U3.4 U4.4 | length 177.6
  Top Layer w0.16: Q2.4 78.011,108.436 ; v2(98.806,103.888) 99.2,103.495 C7.1 ; 99.2,103.05 100.2,103.05 100.338,103.188 U1.18@100.338,104.179 ; U1.63@100.338,115.679 v1(100.338,118.75) ; R48.2 110.947,119.05 111.725,118.272 v2(111.725,117.975) 111.725,119.898 111.03,120.593 R54.2 ; C4.1 v2@111.75,117.95
  Top Layer w0.178: R20.1 v1(74.895,103.245) 74.895,104.095 76.203,105.403 Q2.1 ; Q1.1 75.95,112.642 75.95,111.4 v1(76.85,110.5) 77.575,110.5 78.011,110.064 78.011,108.436
  Top Layer w0.2: Q1.4 v2@80.55,115.453 ; v1@90.06,101.26 Q3.1 ; v1@90.114,96.911 Q4.1 ; C3.1 98.85,118.325 99.294,118.769 v1@100.318,118.769 ; v1@100.357,118.769 R2.1@100.357,120.356 ; v3(114.021,102.895) 114.4,102.516 Q5.1 ; Q5.4 117.2,100.075
  Top Layer w0.229: v1(90.05,101.25) v1@90.06,101.26 ; v1@90.1,96.925 v1@90.114,96.911 ; P7.3 P7.3@90.474,94.075 ; C14.1 88.568,112.468 v2(88.525,112.425) 88.525,111.475 89.032,110.968 C15.1
  Top Layer w0.25: v1(76.85,110.5) R16.1 ; R18.1 79.816,117.209 80.55,116.475 v2@80.55,115.453 ; R13.1 84.625,126.15 86.05,127.575 v2(86.05,128.025) ; C11.2@84.466,128.025 v2(86.05,128.025) ; C13.1@87.675,128.025 v2(86.05,128.025) ; P7.3@90.474,94.075 C21.1 ; C6.1 v4@95.598,107.84 ; C1.1 96.154,115.509 v3(96.495,115.849) C2.1@96.495,114.723 ; v4@95.937,108.179 U1.12@97.838,108.179 ; C8.1 98.4,103.482 v2(98.806,103.888) ; R53.2 98.069,130.581 97.231,131.42 98.146,132.334 R52.2 ; C5.1 110.75,102.8 v2(111.075,103.125) ; P2.5 109.319,146.251 108.56,145.491 109.449,145.491 110.119,146.162 P2.4 ; R56.2 v1@111.639,123.679 ; R10.1 v2@111.1,103.1 ; 117.2,100.075 117.575,100.45 v2(119.7,100.45) R12.1@119.7,101.775 ; TP4.1 v1@121.26,144.856 ; R60.2 123.85,103.708 124.409,104.267 v1(124.409,105.004) ; R62.2 123.772,106.352 124.409,105.715 v1(124.409,105.004) ; R61.2@122.452,105.004 v1(124.409,105.004) ; R8.2 P4.3@129.522,131.675 ; TP3.1 TP2.1
  Top Layer w0.3: R66.2 v1(59.711,107.575) ; R70.2 v1(58.922,88.992) ; U3.4@59.711,109.774 v1(59.711,107.575) ; U4.4@59.795,91.59 59.795,89.866 v1(58.922,88.992) ; RV2.2@60.541,88.992 v1(58.922,88.992) ; RV1.2 60.592,106.694 v1(59.711,107.575) ; R22.1 75.761,110.178 76.083,110.5 v1(76.85,110.5) ; v2@86.821,136.329 v2(86.8,136.35) v2@86.821,136.371 ; P8.3 R6.2@93.202,89.689 ; R41.2 100.203,89.154 v1(100.863,88.494) 101.568,89.198 R42.2 ; R49.2 105.664,89.002 106.197,88.468 v1(107.086,88.468) ; R50.2@107.086,90.099 v1(107.086,88.468) ; R51.2 108.395,88.938 107.925,88.468 v1(107.086,88.468) ; R55.2 111.163,122.136 111.639,122.612 111.639,123.679 111.639,124.758 111.176,125.222 R59.2
  Top Layer w0.4: v1(56.617,130.454) TP1.1
  Top Layer w0.5: U2.2 v2@86.821,136.329 ; v2@86.821,136.371 U2.4
  Top Layer w0.508: P3.1@86.994,146.409 P3.1
  Top Layer w0.8: 72.726,138.276 C18.1
  Top Layer w0.9: C17.1@69.6,131.803 69.6,135.15 72.726,138.276
  Bottom Layer w0.16: C21..2@100.88,101.27 100.025,101.27 99.797,101.041 v7(99.797,99.974) 100.152,100.33 C20.1
  Bottom Layer w0.25: C16.1 95.309,115.426 95.733,115.849 v3(96.495,115.849) ; v2(98.806,103.888) 98.806,104.953 99.642,105.789 C19.2@100.431,105.789 ; R40.2 104.038,109.245 v3(104.546,109.753) ; R58.2@103.075,112.713 104.128,112.713 R57.2
  other v1: 89.819,96.918 111.709,123.673 97.282,131.47 70.7,136.25 121.285,144.882
  other v2: 80.55,115.425
  other v3: 125.374,92.113 104.115,112.7 108.534,145.466
  other v4: 95.783,108.001
I2C1CLK: I2C_CL.1 P10.2 R26.1 R28.2 | length 15.6
  Top Layer w0.254: I2C_CL.1 109.76,85.319 ; R26.1@105.879,82.271 P10.2 109.271,83.896 109.76,84.385 109.76,85.319 ; R28.2 109.76,85.319
I2C1DATA: I2C_D.1 P10.1 R27.2 R29.2 | length 15.3
  Top Layer w0.229: R29.2 111.125,84.379 111.811,83.693 P10.1 R27.2@114.923,82.271 ; 111.175,85.319 I2C_D.1
M+: P13.2 R63.1 R68.1 | length 24.6
  Top Layer w0.3: R63.1 54.01,112.441 53.157,111.588 53.157,104.364 P13.2 53.449,101.409 53.449,93.7 54.584,92.564 R68.1
M-: P13.1 R64.1 R67.1 | length 17.9
  Top Layer w0.3: R64.1 55.401,104.66 P13.1 55.84,101.26 R67.1
"MCU HIBERNATE": C21.2 R5.1 S2.1 U1.14 | length 28.7
  Top Layer w0.2: U1.14@97.838,107.179 99.272,107.179
  Top Layer w0.25: 99.272,107.179 99.644,106.807 99.644,106.121
  Top Layer w0.3: C21.2 96.654,94.075 ; S2.1 96.375,85.478 96.672,85.776 96.672,103.149 99.644,106.121 ; 96.673,97.6 R5.1
"MCU ON INDICATOR D": D5.2 Q5.6 | length 4.2
  Top Layer w0.2: Q5.6 115.575,101.375 115.575,99.575 116.325,98.825 D5.2@116.325,98.2
"MCU ON INDICATOR G": Q5.2 R10.2 U1.25 | length 20.1
  Top Layer w0.2: U1.25 103.838,105.743 104.547,106.452 106.673,106.452 106.873,106.252 107.054,106.252 107.747,105.559 107.747,105.378 109.038,104.087 114.463,104.087 115.175,103.375 115.175,100.725 Q5.2 ; R10.2 112.6,104.087
"MCU STANDBY INDICATOR D": D6.2 Q5.3 | length 1.8
  Top Layer w0.2: D6.2@114.4,98.225 Q5.3
"MCU STANDBY INDICATOR G": Q5.5 R12.2 U1.4 | length 27.9
  Top Layer w0.2: U1.4@97.838,112.179 100.071,112.179 105.4,106.85 107.069,106.85 108.1,105.819 108.1,105.575 109.2,104.475 116.525,104.475 117.275,103.725 117.275,100.9 117.1,100.725 Q5.5 ; 117.275,101.8 R12.2
MISO: P3.10 U1.56 | length 36.6
  Top Layer w0.2: U1.56@103.838,115.679 103.838,121.613
  Top Layer w0.3: P3.10 104.5,141.666 104.5,122.275 103.838,121.613
MOSI: P3.9 U1.57 | length 33.4
  Top Layer w0.2: U1.57@103.338,115.679 103.338,122.238
  Top Layer w0.3: P3.9 103.491,140.135 103.491,122.391 103.338,122.238
NetC10_1: C10.1 U1.31 | length 4.3
  Top Layer w0.2: v4(106.825,105.7) 106.838,105.687 U1.31@106.838,104.179
  Bottom Layer w0.4: C10.1 106.806,105.719 v4(106.825,105.7)
NetC10_2: C10.2 U1.47 | length 4.2
  Top Layer w0.25: v4(107.725,113.125) 107.779,113.179 U1.47@109.338,113.179
  Bottom Layer w0.4: C10.2@106.9,111.212 C10.2 106.806,112.206 v4(107.725,113.125)
NetC17_2: C17.2 C18.2 F1.1 P5.2 P5.4 P5.6 | length 26
  Top Layer w0.6: F1.1 77.907,135.178
  Top Layer w0.8: C17.2@74.509,131.486 74.759,131.736 C17.2 74.8,131.878 74.8,135.5 75.625,136.325 77.871,136.325 ; C18.2 77.871,141.846
  Top Layer w1: C18.2 77.871,136.325 77.907,135.178
  Top Layer w1.016: P5.6 P5.4 P5.2 77.871,145.622 77.871,141.846
NetD1_1: D1.1 R15.1 | length 2
  Top Layer w0.178: R15.1@71.094,115.419 D1.1@73.088,115.419
NetD2_1: D2.1 R17.1 | length 1.3
  Top Layer w0.25: R17.1@72.868,112.411 D2.1@72.868,113.7
NetD3_1: D3.1 R19.1 | length 1.2
  Top Layer w0.25: D3.1@72.881,107.289 72.882,107.291 R19.1@72.882,108.464
NetD4_1: D4.1 R21.1 | length 1.8
  Top Layer w0.25: R21.1 71.064,105.439 D4.1@72.881,105.439
NetD5_1: D5.1 R9.1 | length 3.7
  Top Layer w0.25: D5.1@116.325,96.7 117.375,96.7 118.175,97.5 R9.1
NetD6_1: D6.1 R11.1 | length 4.2
  Top Layer w0.2: R11.1 112.6,97.1 112.975,96.725 D6.1@114.4,96.725
NetD+_1: D+.1 R4.1 U1.45 | length 37
  Top Layer w0.17: U1.45@109.338,112.179 110.171,112.179
  Top Layer w0.25: 110.171,112.179 112.079,112.179 112.827,112.927 112.827,135.738 ; R4.1 110.519,140.306 112.827,137.998 112.827,135.738 ; D+.1 112.821,135.744 112.827,135.738
NetD-_1: D-.1 R3.1 U1.44 | length 37.8
  Top Layer w0.17: U1.44@109.338,111.679 110.071,111.679
  Top Layer w0.25: 110.071,111.679 112.579,111.679 113.625,112.725 113.625,139.375 112,141 112,143.473 R3.1 ; 113.625,135.763 115.187,135.763 D-.1
NetP2_2: P2.2 R3.2 | length 3.1
  Top Layer w0.25: P2.2 111.719,146.206 112.044,145.881 R3.2
NetP2_3: P2.3 R4.2 | length 3.1
  Top Layer w0.25: R4.2 110.519,145.819 110.919,146.219 P2.3
NetP6_2: P6.2 R1.1 | length 3.9
  Top Layer w0.25: R1.1@93.027,124.562 P6.2
NetP11_1: P11.1 R30.2 | length 5.7
  Top Layer w0.2: R30.2@122.43,116.53 P11.1
NetP11_2: P11.2 R31.2 | length 8.8
  Top Layer w0.2: R31.2 129.401,115.261 P11.2
NetP11_3: P11.3 R32.2 | length 5.7
  Top Layer w0.2: R32.2@122.431,113.99 P11.3
NetP11_4: P11.4 R33.2 | length 8.8
  Top Layer w0.2: R33.2 129.412,112.732 P11.4
NetP11_5: P11.5 R34.2 | length 5.7
  Top Layer w0.2: R34.2@122.443,111.45 P11.5
NetP11_6: P11.6 R35.1 | length 8.8
  Top Layer w0.2: R35.1 129.424,110.204 P11.6
NetP11_7: P11.7 R36.1 | length 5.7
  Top Layer w0.2: R36.1@122.454,108.91 P11.7
NetP11_8: P11.8 R37.1 | length 8.8
  Top Layer w0.2: R37.1 129.435,107.675 P11.8
NetR6_1: R6.1 S2.2 | length 4.6
  Top Layer w0.25: 92.375,85.475 93.203,86.303 R6.1
  Top Layer w0.3: S2.2 92.375,85.475
NetR8_1: R8.1 S3.2 | length 5.1
  Top Layer w0.25: S3.2 124.8,129.35 124.875,129.425 R8.1
NetR28_1: R28.1 U1.29 | length 14.1
  Top Layer w0.2: U1.29@105.838,104.179 105.838,100.309 109.76,96.387 R28.1
NetR29_1: R29.1 U1.30 | length 14.5
  Top Layer w0.2: U1.30@106.338,104.179 106.338,101.307 111.125,96.52 R29.1
NetR40_1: R40.1 U1.17 | length 6.4
  Top Layer w0.229: U1.17@99.838,104.179 99.838,105.726 100.061,105.949 100.061,106.944 99.838,107.167 v3(99.838,109.261)
  Bottom Layer w0.229: v3(99.838,109.261) R40.1@101.012,109.261
NetR41_1: R41.1 U1.20 | length 13
  Top Layer w0.2: R41.1 100.203,95.936 101.361,97.094 101.361,104.156 U1.20@101.338,104.179
NetR42_1: R42.1 U1.21 | length 12.6
  Top Layer w0.2: R42.1 101.568,96.056 101.838,96.326 U1.21@101.838,104.179
NetR48_1: R48.1 U1.50 | length 4.6
  Top Layer w0.2: U1.50@106.838,115.679 106.838,118.344 107.544,119.05 R48.1
NetR49_1: R49.1 U1.26 | length 13.1
  Top Layer w0.2: U1.26@104.338,104.179 104.338,97.237 105.664,95.91 R49.1
NetR50_1: R50.1 U1.27 | length 13.4
  Top Layer w0.2: U1.27@104.838,104.179 104.838,98.159 107.029,95.968 R50.1
NetR51_1: R51.1 U1.28 | length 13.8
  Top Layer w0.2: U1.28@105.338,104.179 105.338,99.107 108.395,96.05 R51.1
NetR52_1: R52.1 U1.58 | length 18.5
  Top Layer w0.2: R52.1 101.829,132.334 102.838,131.325 U1.58@102.838,115.679
NetR53_1: R53.1 U1.59 | length 16.4
  Top Layer w0.2: R53.1 101.575,130.581 102.338,129.818 U1.59@102.338,115.679
NetR54_1: R54.1 U1.51 | length 6.3
  Top Layer w0.2: U1.51@106.338,115.679 106.338,119.266 107.664,120.593 R54.1
NetR55_1: R55.1 U1.52 | length 8
  Top Layer w0.2: U1.52@105.838,115.679 105.838,120.214 107.759,122.136 R55.1
NetR56_1: R56.1 U1.53 | length 9.7
  Top Layer w0.2: U1.53@105.338,115.679 105.338,120.349 107.264,122.276 107.264,123.266 107.677,123.679 R56.1
NetR57_1: R57.1 U1.2 | length 5.1
  Top Layer w0.229: U1.2@97.838,113.179 99.286,113.179 100.101,113.995 v4(101.651,113.995)
  Bottom Layer w0.229: v4(101.651,113.995) R57.1
NetR58_1: R58.1 U1.3 | length 4
  Top Layer w0.229: U1.3@97.838,112.679 100.03,112.679 v4@100.393,113.043
  Bottom Layer w0.229: v4@100.393,113.043 100.762,112.674 R58.1
  other v4: 100.368,112.84
NetR59_1: R59.1 U1.54 | length 11.5
  Top Layer w0.2: U1.54@104.838,115.679 104.838,120.535 106.655,122.352 106.655,124.181 107.696,125.222 R59.1
NetR60_1: R60.1 U1.33 | length 12.6
  Top Layer w0.16: U1.33@109.338,106.179 117.366,106.179 119.837,103.708 R60.1
NetR61_1: R61.1 U1.34 | length 12.3
  Top Layer w0.16: U1.34@109.338,106.679 118.187,106.679 119.836,105.03 R61.1
NetR62_1: R62.1 U1.35 | length 11.9
  Top Layer w0.16: U1.35@109.338,107.179 118.957,107.179 119.784,106.352 R62.1
NetR63_2: R63.2 R65.2 U3.2 | length 4.8
  Top Layer w0.254: R63.2@56.93,112.467 R65.2 ; R63.2@57.03,112.314 U3.2@59.711,112.314
NetR64_2: R64.2 R66.1 U3.3 | length 4.6
  Top Layer w0.254: R66.1@56.901,109.077 R64.2 ; R64.2@56.998,111.044 U3.3@59.711,111.044
NetR67_2: R67.2 R69.2 U4.2 | length 4.5
  Top Layer w0.3: R67.2@57.324,94.13 U4.2 U4.2@59.795,94.13 ; R67.2 R69.2@57.34,96.409
NetR68_2: R68.2 R70.1 U4.3 | length 4.3
  Top Layer w0.3: R70.1@57.333,90.523 R68.2 ; R68.2@57.518,92.86 U4.3@59.795,92.86
NetRV1_3: RV1.3 U3.5 | length 2.2
  Top Layer w0.254: RV1.3 U3.5@64.615,109.57
NetRV2_3: RV2.3 U4.5 | length 3.1
  Top Layer w0.3: RV2.3 63.971,89.677 64.495,90.201 U4.5@64.495,91.59
NRST: C16.2 P4.5 R7.1 S3.1 U1.7 | length 59.3
  Top Layer w0.16: U1.7@97.838,110.679 v3@99.621,110.679
  Top Layer w0.25: v2(116.55,126.625) R7.1
  Top Layer w0.4: v2(116.55,126.625) S3.1@116.55,129.325
  Bottom Layer w0.4: C16.2 95.3,112.872 95.3,110.875 95.525,110.65 v3(99.65,110.65) ; v3@99.621,110.679 103.529,110.679 108.825,115.975 108.825,124.825 110.625,126.625 v2(116.55,126.625) ; v2@116.55,126.61 P4.5
OFF_N_U3: RV1.1 U3.1 | length 11.1
  Top Layer w0.3: U3.1 61.334,113.584 61.765,113.153 61.765,109.014 63.508,107.271 63.508,106.413 63.877,106.044 RV1.1
OFF_N_U4: RV2.1 U4.1 | length 9.7
  Top Layer w0.3: U4.1@59.795,95.4 61.34,95.4 61.815,94.926 61.815,88.784 62.222,88.377 RV2.1
PB8: PB8.1 U1.61 | length 24.1
  Top Layer w0.16: U1.61@101.338,115.679 v5@101.338,116.975
  Top Layer w0.2: v1(99.466,135.407) PB8.1
  Bottom Layer w0.2: v1(99.466,135.407) 102.083,132.791 102.083,117.907 v5(101.244,117.069)
PB9: PB9.1 U1.62 | length 25.2
  Top Layer w0.16: U1.62@100.838,115.679 100.838,116.723 100.712,116.848 100.712,117.502 v5(101.244,118.034)
  Top Layer w0.2: v1(95.783,135.484) PB9.1@95.783,138.379
  Bottom Layer w0.2: v1(95.783,135.484) 101.244,130.023 v5(101.244,118.034)
PH0_OSC: C14.2 U1.5 Y1.1 | length 11.6
  Top Layer w0.25: C14.2 v1@93.218,112.468 ; v1(93.375,112.625) 94.321,111.679 U1.5@97.838,111.679
  Bottom Layer w0.25: Y1.1@91.35,116.372 91.35,113.175 91.9,112.625 v1(93.375,112.625)
PH1_OSC: C15.2 U1.6 Y1.2 | length 11.6
  Top Layer w0.25: C15.2 v1@93.243,110.968 ; v1(93.35,111.075) 93.454,111.179 U1.6@97.838,111.179
  Bottom Layer w0.25: Y1.2 91.383,110.458 92,111.075 v1(93.35,111.075)
PWM1: PWM1.1 Q3.2 Q3.5 U1.15 | length 13.3
  Top Layer w0.2: Q3.2 Q3.5 91.795,104.045
  Top Layer w0.229: PWM1.1@89.154,105.512 90.938,105.512 92.1,104.35 ; 91.795,104.045 92.1,104.35 ; U1.15@97.838,106.679 96.301,106.679 93.972,104.35 92.1,104.35
PWM1_OUT: P7.1 Q3.3 Q3.6 | length 18.2
  Top Layer w0.2: 89.735,103.16 Q3.6 ; 92.445,100.495 Q3.3
  Top Layer w0.25: P7.1 85.354,98.779 87.7,101.125 ; 89.735,103.16 87.7,101.125 ; 92.445,100.495 92.25,100.3 88.525,100.3 87.7,101.125
PWM2: PWM2.1 Q4.2 Q4.5 U1.16 | length 17.3
  Top Layer w0.152: Q4.5 Q4.5@91.745,98.95
  Top Layer w0.2: Q4.2 Q4.5 ; Q4.5@91.745,98.95 91.745,99.67
  Top Layer w0.25: 91.745,99.67 91.875,99.8 93.575,99.8 94.55,100.775 ; PWM2.1@95.275,97.384 95.275,100.05 94.55,100.775 ; U1.16@97.838,106.179 96.354,106.179 94.55,104.375 94.55,100.775
PWM2_OUT: P8.1 Q4.3 Q4.6 | length 18.9
  Top Layer w0.2: 89.275,98.875 Q4.6@91.031,98.875 ; 92.395,96.095 Q4.3
  Top Layer w0.25: P8.1 85.379,91.354 86.6,92.575 86.6,96.2 87.9,97.5 ; 89.275,98.875 87.9,97.5 ; 92.395,96.095 91.9,95.6 89.8,95.6 87.9,97.5
SWCLK: P4.2 U1.49 | length 38.6
  Top Layer w0.2: U1.49@107.338,115.679 107.338,116.863 v2(107.823,117.348)
  Bottom Layer w0.4: v2(107.823,117.348) 107.823,117.577 107.35,118.05 107.35,129.875 111.705,134.23 P4.2
SWDIO: P4.4 U1.46 | length 28.9
  Top Layer w0.17: U1.46@109.338,112.679 110.579,112.679 v2(111.25,113.35)
  Top Layer w0.3: v2(125.725,124.3) 125.725,127.55 127.325,129.15 P4.4
  Bottom Layer w0.3: v2@111.275,113.325 122.237,124.287 v2@125.737,124.287
TEST1: R30.1 U1.43 | length 13.8
  Top Layer w0.2: U1.43@109.338,111.179 113.004,111.179 118.35,116.525 R30.1
TEST2: R31.1 U1.42 | length 13.5
  Top Layer w0.2: U1.42@109.338,110.679 113.779,110.679 118.361,115.261 R31.1
Test3: R32.1 U1.41 | length 13.2
  Top Layer w0.2: U1.41@109.338,110.179 114.504,110.179 118.321,113.996 R32.1
Test4: R33.1 U1.40 | length 12.9
  Top Layer w0.2: U1.40@109.338,109.679 115.304,109.679 118.357,112.732 R33.1
Test5: R34.1 U1.39 | length 12.5
  Top Layer w0.2: U1.39@109.338,109.179 116.104,109.179 118.393,111.468 R34.1
Test6: R35.2 U1.38 | length 12.2
  Top Layer w0.2: U1.38@109.338,108.679 116.854,108.679 118.379,110.204 R35.2
Test7: R36.2 U1.37 | length 11.9
  Top Layer w0.2: U1.37@109.338,108.179 117.654,108.179 118.414,108.939 R36.2
Test8: R37.2 U1.36 | length 11.6
  Top Layer w0.2: U1.36@109.342,107.675 R37.2
VBAT: P1.2 P5.5 P9.2 P9.4 | length 31.1
  Top Layer w0.8: 67.876,144.9 P5.5
  Top Layer w1.524: P9.2 62.655,146.467 P1.2 67.735,149.743 ; P9.4 67.735,149.743 ; P5.5 71.21,149.743 67.735,149.743
VDD: 3v3.1 C1.2 C2.2 C3.2 C4.2 C5.2 C6.2 C7.2 C8.2 C13.2 P4.1 P7.2 P8.2 P11.9 P12.3 Q3.4 Q4.4 R1.2 R5.2 R7.2 R9.2 R11.2 R15.2 R17.2 R19.2 R21.2 R26.2 R27.1 U1.1 U1.13 U1.19 U1.32 U1.48 U1.64 U2.3 U3.7 U4.7 | length 68.7
  Top Layer w0.16: v1(97.838,115.675) U1.64@99.833,115.675
  Top Layer w0.19: Q3.4@92.456,103.15 v1(93.6,103.15)
  Top Layer w0.2: Q4.4 v1@93.589,98.811 ; v3@96.456,112.51 C2.2 ; R5.2 99.2,98.895 99.695,99.39 v5(100.609,99.39) 100.609,100.305 100.838,100.533 100.838,100.925 ; C8.2@99.825,100.925 100.838,100.925 ; C7.2 100.838,102.1 ; U1.19@100.838,104.179 100.838,102.1 ; v1(105.867,79.731) R26.2 ; U1.32@107.338,104.179 107.338,102.8 ; C5.2 107.338,102.8 ; v3(109.322,114.681) C4.2@110.744,114.681 ; U1.48@109.338,113.679 v3@109.338,114.665 ; R11.2 109.925,99.375 v1(107.825,101.475) 107.338,101.962 107.338,102.8 ; v2(114.935,79.705) R27.1 ; 100.838,100.925 100.838,102.1
  Top Layer w0.25: R21.2 70.274,106.925 69.935,107.264 v1(69.935,110.541) 69.935,113.623 70.212,113.9 R15.2 ; R17.2 71.333,111.245 70.629,110.541 71.382,109.788 R19.2 ; R1.2 v2(93.015,127.787) ; C6.2 v4(95.588,106.84) ; U1.1@97.838,113.679 v1(97.838,115.675) ; v1@97.85,115.687 C3.2 ; R7.2 v2(124.75,128.125)
  Top Layer w0.254: U3.7@64.411,112.314 v1(66.63,112.314) ; U4.7@64.495,94.13 v1(66.617,94.13) ; P7.2@87.875,94.095 P7.2 ; C13.2@89.121,128.071 v6@89.121,130.265 ; v1@93.589,98.811 v1@93.6,98.8 ; R9.2 v2@121.525,98.975
  Top Layer w0.3: v3(56.718,127.102) 3v3.1 ; v4(95.588,106.84) 96.427,107.679 U1.13@97.838,107.679
  Top Layer w0.35: v1(69.935,110.541) 70.629,110.541
  Top Layer w0.356: C1.2 94.956,113.045 95.504,112.497 v3(96.469,112.497)
  Top Layer w0.5: v6@89.121,130.265 U2.3
  other v1: 93.409,98.814
  other v2: 121.525,98.95
  other v6: 89.122,130.265
VIN: C11.1 F1.2 R14.2 U2.1 Vin.1 | length 16.1
  Top Layer w0.3: R14.2 80.775,127.987 80.775,128.887
  Top Layer w0.5: Vin.1@78.559,127.987 80.775,127.987 C11.1@82.838,127.987
  Top Layer w0.6: 80.775,127.987 F1.2
  Top Layer w0.8: F1.2@80.838,133.45 U2.1@84.503,133.45
"VJTAG 5V0": P3.2 P5.1 | length 10
  Top Layer w1.524: P5.1 P3.2@87.018,148.988
VPU: P3.3
VUSB: P2.1 P5.3 | length 44.6
  Top Layer w0.229: 111.75,150.475 112.519,149.706 P2.1
  Top Layer w1.016: 107.43,151 108.43,152 110.225,152 111.75,150.475
  Top Layer w1.27: P5.3 74.504,151.404 75.525,152.425 99.725,152.425 101.15,151 107.43,151
pads on no net: MT1.1 MT2.1 MT3.1 MT4.1 P2.6 P2.7 P2.8 P2.9 P2.MH1 P2.MH2 P3.6 P3.7 P3.8 U3.8 U4.8

## Polygon pours and split planes (outlines as drawn)
VDD on POWER (split plane): 135.29,76.71 51.31,76.71 51.31,155.69 135.29,155.69
GND on GROUND (split plane): 135.29,76.71 51.31,76.71 51.31,155.69 135.29,155.69

## Keep-outs
Keep-Out Layer:
  lines w0.3: 52.1,77.5 52.1,154.9 134.5,154.9 134.5,77.5 52.1,77.5

## Other copper
Top Layer:
  region net VBAT: 71.964,148.988 67.876,144.9 67.75,144.9 67.75,149.15 68.7,150.1 71.049,149.903
  region net VBAT: 67.825,142.625 67.675,142.475 62.475,142.475 62.655,146.467 65.931,149.743 67.75,149.888 67.75,144.9
  region net NetC17_2: 71.964,146.448 77.072,146.448 78.003,145.517 77.902,145.415 77.902,141.91 76.503,141.91 71.476,145.948
  region net VIN: 80.775,127.051 81.686,127.962 81.686,128.146 80.775,129.184 79.781,128.064 79.781,128.016 80.721,127.076

## Silkscreen, mask and mechanical layers (free items; w line width, h text height)
Top Overlay:
  lines w0.254: 53.365,121.996 53.975,121.996 55.296,120.675 55.778,120.675 ; 54.038,120.587 54.686,121.234
  text "Group 3 - Power" at 53.34,122.885 h1.52
Drill Drawing:
  text ".LEGEND" at 25.782,75.964 h1
  text "Drill Drawing." at 25.782,73.424 h1

## Dimensions
52.1,77.5 to 52.1,154.9 on Mechanical 1
52.1,77.5 to 134.5,77.5 on Mechanical 1

## Text inside footprints (layer, text, board x,y; h text height)
P1: Top Overlay "1" at 62.16,151.767 h1
P2: Mechanical 1 "PCB Edge" at 114.956,156.226 h1 r180
P3: Top Overlay "2" at 84.826,148.231 h1; Top Overlay "1" at 85.326,145.691 h1; Top Overlay "10" at 98.386,148.231 h1; Top Overlay "9" at 98.386,145.691 h1
P4: Top Overlay "1" at 125.447,136.033 h1
P5: Top Overlay "6" at 70.44,146.956 h1 r180; Top Overlay "5" at 70.44,149.496 h1 r180; Top Overlay "2" at 79.584,146.956 h1 r180; Top Overlay "1" at 79.076,149.496 h1 r180
P6: Top Overlay "1" at 99.382,128.587 h1 r270
P9: Top Overlay "1" at 61.105,136.393 h1 r90
P10: Top Overlay "1" at 111.752,86.296 h1 r270
P11: Top Overlay "9" at 127.38,105.17 h1 r270; Top Overlay "10" at 129.92,105.17 h1 r270; Top Overlay "1" at 127.38,118.23 h1 r270; Top Overlay "2" at 129.92,118.73 h1 r270
P12: Top Overlay "1" at 78.621,97.473 h1
P13: Top Overlay "1" at 57.764,106.276 h1 r90